# Altium PCB PCB1.PcbDoc (part 3 of 4)
Units mm, origin at the board's own origin, x right, y up, seen from the top; angles counter-clockwise.
Board outline 55.25 x 50.25 mm, 10 copper layers (Top Layer, GND L2, Layer 3, GND L4, PWR L5, PWR L6, GND L7, Layer 8, GND L9, Bottom Layer), stack 1.615 mm thick; 238 components, 362 nets, 1809 pads, 129 vias.
Unrouted connection lines stored in the file: 1070.
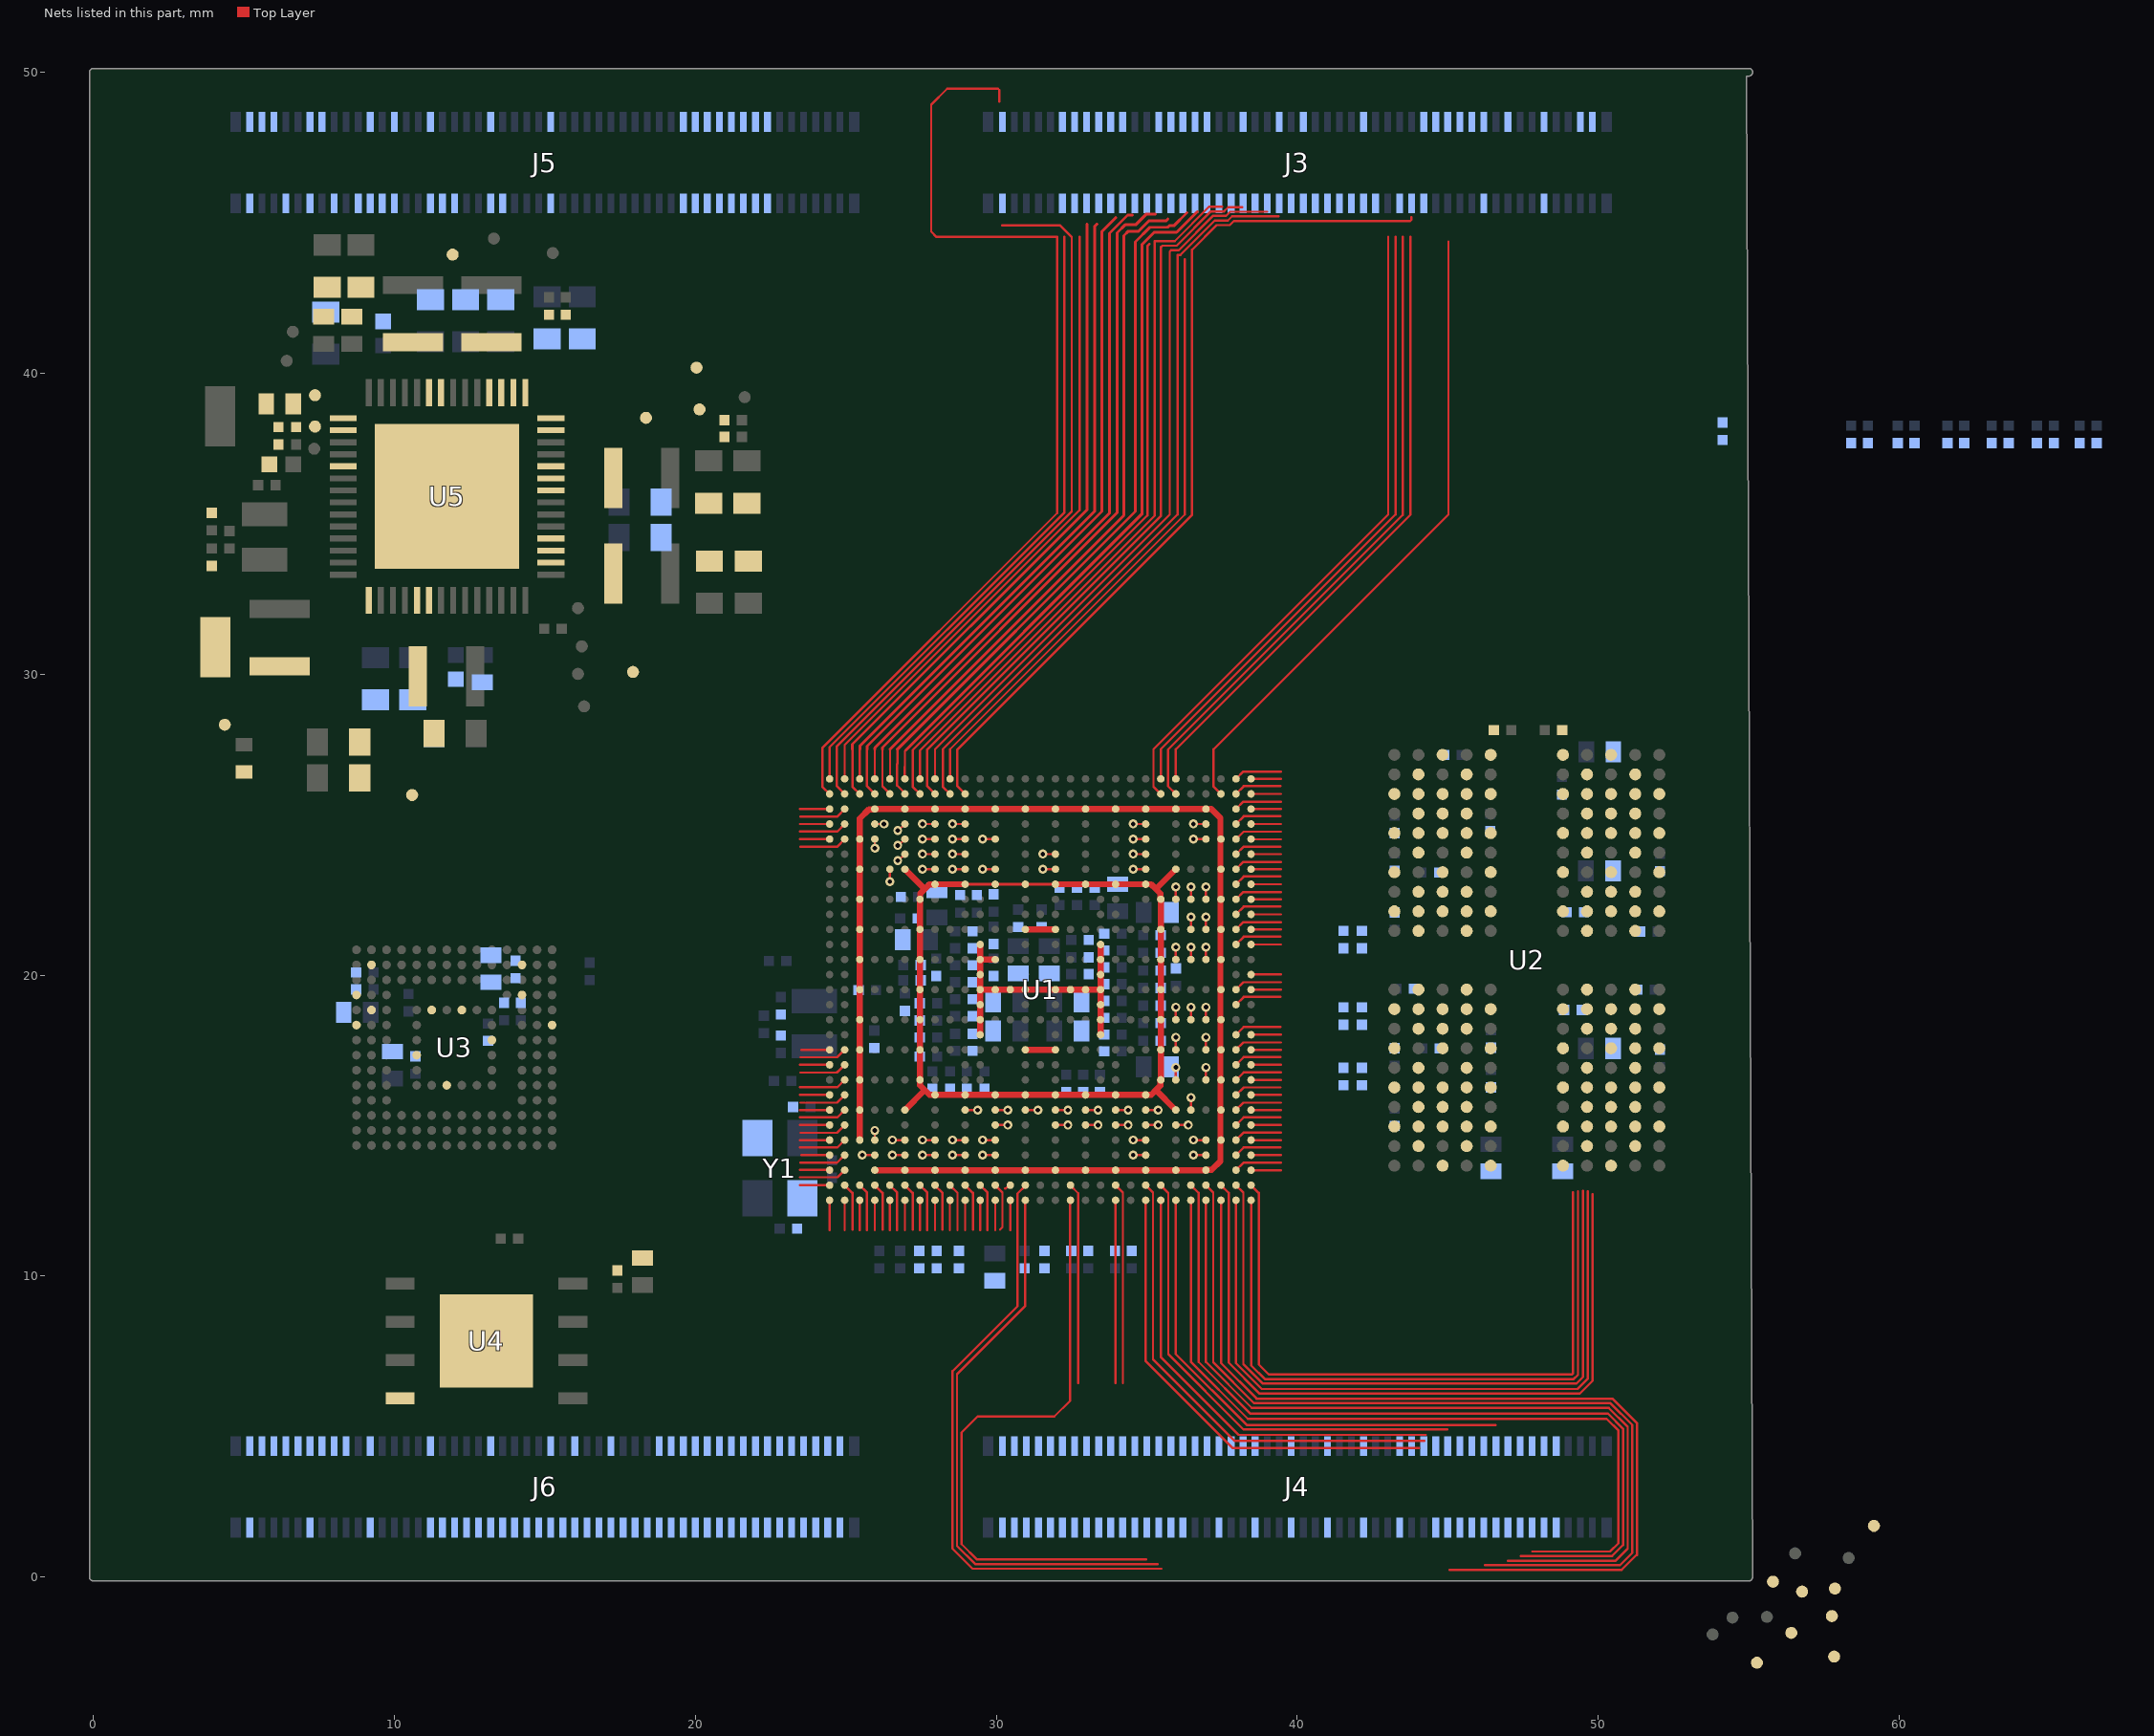
[diagram p2: the nets of this part, all layers, seen from the top]

## Via types
v1: diameter 0.3, hole 0.15, Top Layer to Bottom Layer, tented both sides, 129 vias

## Nets (pads, with @x,y where several pads share a name; then routed paths per layer and width w, separated by ;. In a path a pad name is that pad's centre, name@x,y a point inside that pad or via, vN(x,y) a via of type N, cw(c..) or ccw(c..) an arc to the next point about the centre after c; other vN are vias at no path point) (continued)
NetC85_1: (continued)
  Top Layer w0.076: U1.A13@32.456,12.52 32.456,5.861 31.929,5.334 29.382,5.334 28.848,4.801 28.848,1.098 29.362,0.584 34.976,0.584
NetC87_2: C87.2 U1.F18 | length 0.4
  Top Layer w0.076: U1.F18@29.964,15.02 v1@30.377,15.02
  other v1: 30.38,15.018
NetC106_1: C106.1 PTP19.1 U5.2
NetC112_2: C112.2 PTP25.1 U5.1
NetC143_1: C143.1 U1.B10 | length 6.7
  Top Layer w0.076: U1.B10@33.964,13.02 34.207,12.777 34.207,6.452
NetL2_1: L2.1 PTP16.1 U5.45 U5.46
NetL3_1: L3.1 PTP20.1 U5.36 U5.37
NetL4_1: L4.1 PTP24.1 U5.31 U5.32
NetL5_1: L5.1 PTP27.1 U5.19 U5.20
NetL6_1: L6.1 PTP29.1 U5.15
NetL7_1: L7.1 PTP31.1 U5.50 U5.51
NetPTP9_1: PTP9.1 R14.2 U1.R1 | length 1
  Top Layer w0.076: U1.R1@38.464,19.52 39.45,19.52
NetPTP10_1: PTP10.1 U1.P2 | length 1.6
  Top Layer w0.076: U1.P2@37.964,19.02 38.221,19.278 39.439,19.278
NetPTP12_1: R18.2 U1.F10 | length 0.4
  Top Layer w0.076: U1.F10@33.964,15.02 v1@34.377,15.02
  other v1: 34.38,15.018
NetPTP13_1: U1.F12 | length 0.4
  Top Layer w0.076: U1.F12@32.964,15.02 v1@33.377,15.02
  other v1: 33.38,15.018
NetPTP23_1: PTP23.1 R28.1 R29.1 U5.38
NetR21_1: R21.1 U1.AJ28 | length 21.2
  Top Layer w0.076: U1.AJ28@24.964,26.52 24.964,27.648 32.763,35.446 32.763,44.526
NetR26_1: R26.1 R27.1 U5.44